# Altium PCB PCB1.PcbDoc
Units mil, origin at the board's own origin, x right, y up, seen from the top; angles counter-clockwise.
Board outline 3880 x 4010 mil, 2 copper layers (Top Layer, Bottom Layer); 84 components, 75 nets, 261 pads, 44 vias.
Unrouted connection lines stored in the file: 6.
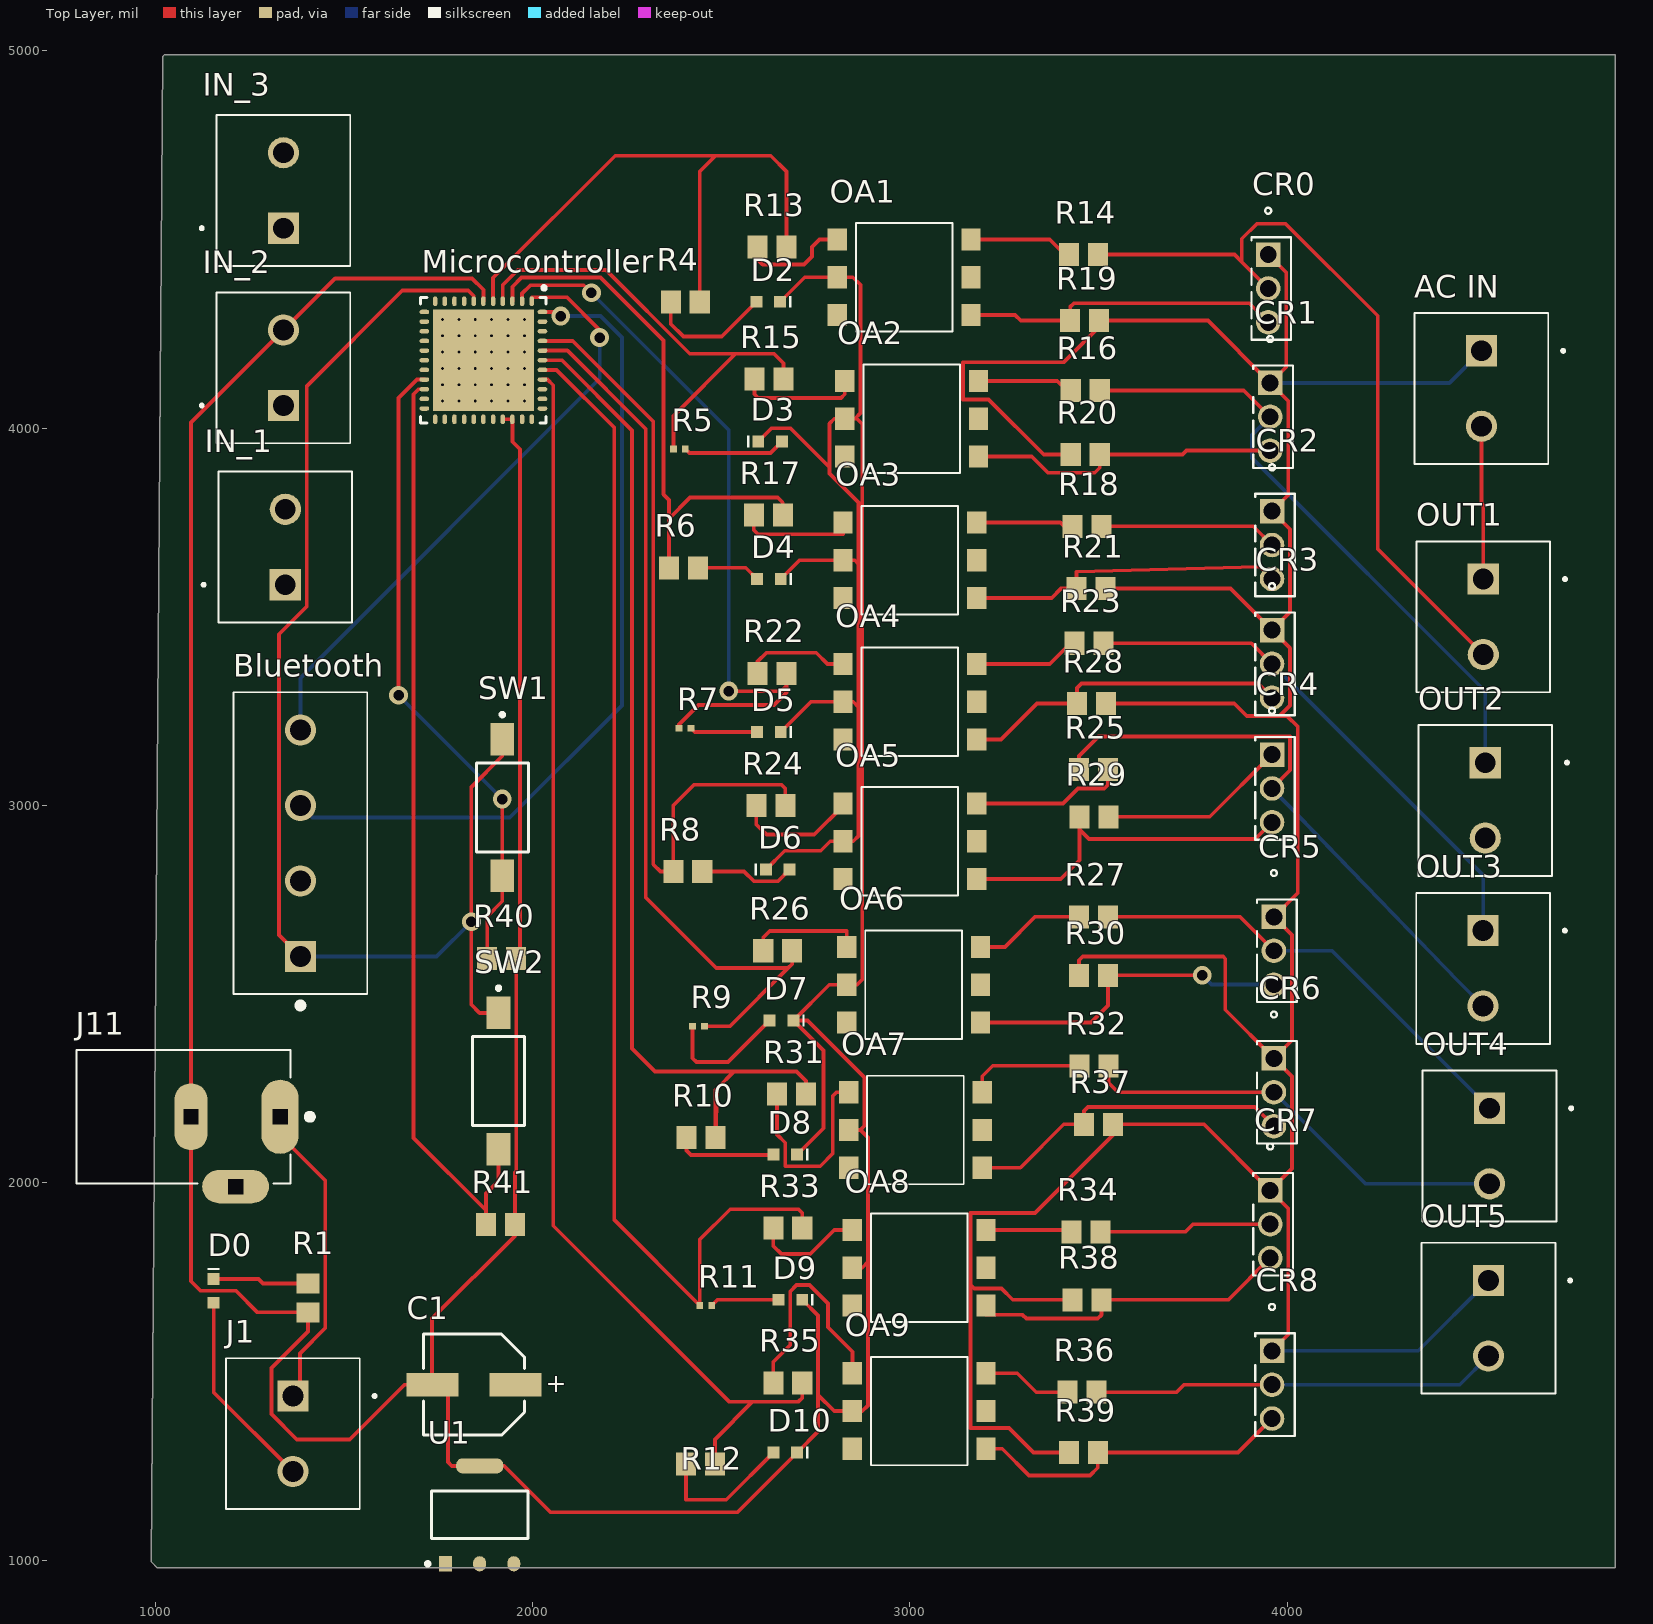
[diagram p0: Top Layer view]
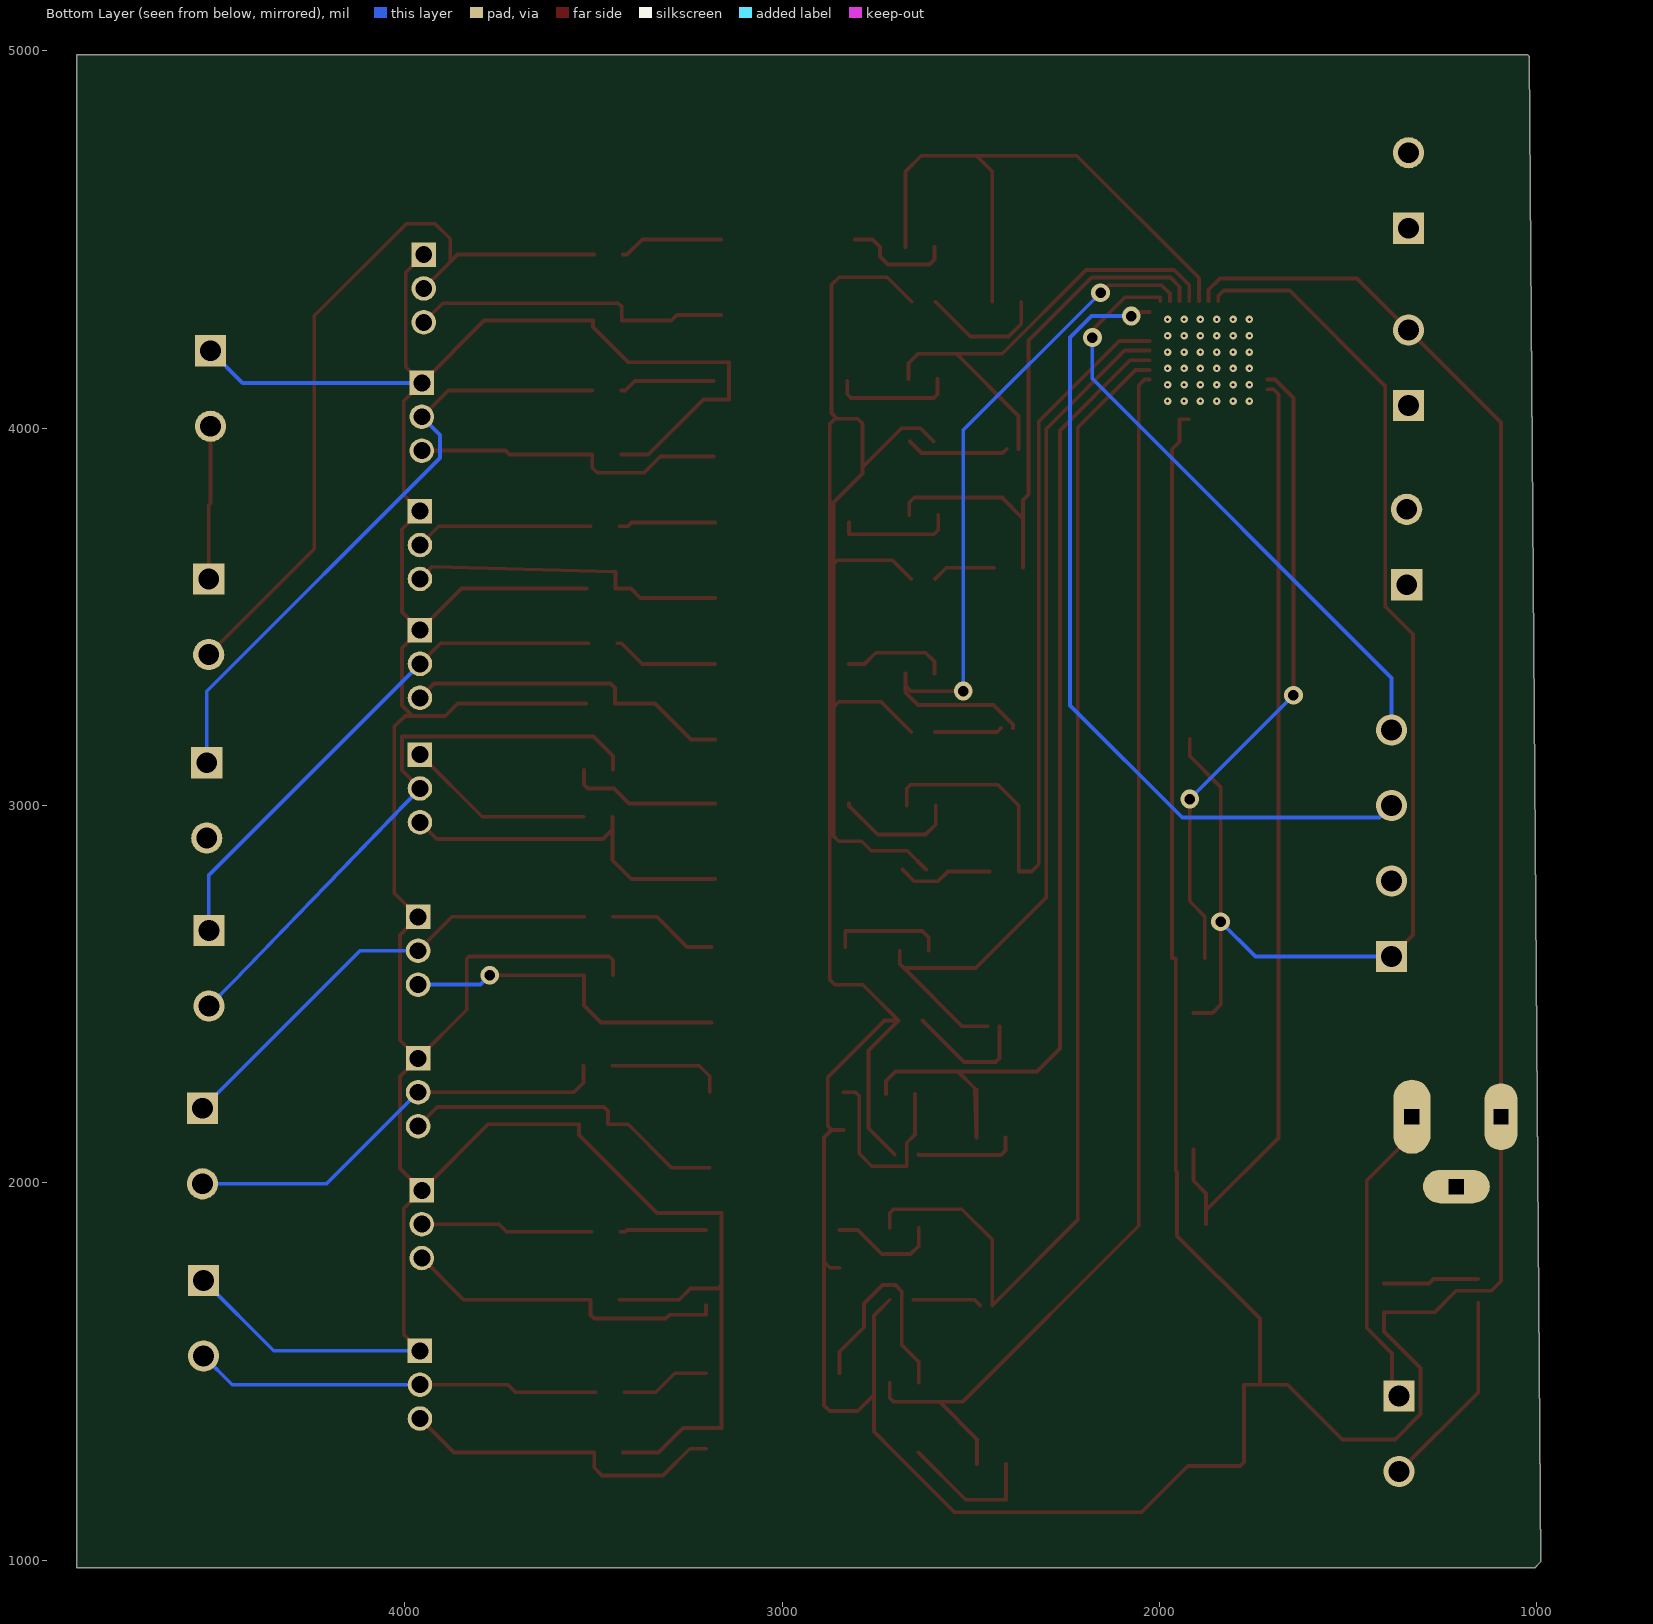
[diagram p1: Bottom Layer view, seen from below]

## Layer stack, top to bottom
Top Solder: solder mask 0.4, Solder Resist, Dk 3.5
Top Layer: signal copper 1.4
Dielectric 1: dielectric 12.6, FR-4, Dk 4.8
Bottom Layer: signal copper 1.4
Bottom Solder: solder mask 0.4, Solder Resist, Dk 3.5

## Board outline
1020,4985 1025,4990 4870,4990 4870,980 1005,980 990,995

## Design rules (kind name [scope] priority, off if disabled: settings)
Clearance [All] p1: gap=10 ignorepadtopadclearanceinfootprint=FALSE
PolygonConnect [All] p1: connectstyle=Relief reliefconductorwidth=10 reliefentries=4 polygonreliefangle="90 Angle" airgapwidth=10
RoutingVias [All] p1: holewidth=28 width=50 viastyle="Through Hole" minholewidth=28 minwidth=50 maxholewidth=28 maxwidth=50
SolderMaskExpansion [All] p1: expansion=4 istentingtop=FALSE
SupplyNets "Schematic Supply Nets" [InNet('GND')] p1: voltage=0.000
Width [All] p1: maxlimit=10 minlimit=10 preferedwidth=10
30 further rules are at their usual default settings.

## Classes and differential pairs
component class U_Microcontroller: Microcontroller
component class U_OutputSockets: OUT1 OUT2 OUT3 OUT4 OUT5
component class U_InputSockets: IN_1 IN_2 IN_3
component class U_Source_and_regulation: C1 D0 J1 J11 Q1 R1 U1
component class U_Probe_Switches: R40 R41 SP1 SP2 SW1 SW2
component class U_LEDS: D2 D3 D4 D5 D6 D7 D8 D9 D10 R4 R5 R6 R7 R8 R9 R10 R11 R12
component class U_Communication: Ble Bluetooth
component class U_AC_input: "AC IN" AC_in

## Components (designator, comment, footprint, x,y, rotation, side; value= is the part's Value field where it differs from the comment)
"AC IN" "796949-2" TE_796949-2 4515,4105 r270 top
Bluetooth "796949-4" TE_796949-4 1385,2600 r90 top
C1 "865060245006" WCAP-ASLL_D6.3H7.7 1844.76,1465 r0 top
CR0 "T405-600H" IPAK_STM 3950,4460 r270 top
CR1 "T405-600H" IPAK_STM 3955,4120 r270 top
CR2 "T405-600H" IPAK_STM 3960,3780 r270 top
CR3 "T405-600H" IPAK_STM 3960,3465 r270 top
CR4 "T405-600H" IPAK_STM 3960,3135 r270 top
CR5 "T405-600H" IPAK_STM 3965,2704.76 r270 top
CR6 "T405-600H" IPAK_STM 3965,2329.76 r270 top
CR7 "T405-600H" IPAK_STM 3955,1980 r270 top
CR8 "T405-600H" IPAK_STM 3960,1554.76 r270 top
D0 "Amber, 2V, 140°" WL-SMCW_0603_150060xx75000 1155,1713.5 r270 top
D2 "Amber, 2V, 140°" WL-SMCW_0603_150060xx75000 2625,4335 r180 top
D3 "Amber, 2V, 140°" WL-SMCW_0603_150060xx75000 2630,3965 r0 top
D4 "Amber, 2V, 140°" WL-SMCW_0603_150060xx75000 2626.5,3600 r180 top
D5 "Amber, 2V, 140°" WL-SMCW_0603_150060xx75000 2626.5,3195 r180 top
D6 "Amber, 2V, 140°" WL-SMCW_0603_150060xx75000 2650,2830 r0 top
D7 "Amber, 2V, 140°" WL-SMCW_0603_150060xx75000 2660,2430 r180 top
D8 "Amber, 2V, 140°" WL-SMCW_0603_150060xx75000 2670,2075 r180 top
D9 "Amber, 2V, 140°" WL-SMCW_0603_150060xx75000 2683.5,1690 r180 top
D10 "Amber, 2V, 140°" WL-SMCW_0603_150060xx75000 2670,1285 r180 top
IN_1 "Switch-IN" TE_796949-2 1345,3685 r90 top
IN_2 "Switch-IN" TE_796949-2 1340,4160 r90 top
IN_3 "Switch-IN" TE_796949-2 1340,4630 r90 top
J1 "Switch-IN" TE_796949-2 1365,1335 r270 top
J11 "PJ-002A" CUI_PJ-002A 1331.22,2175 r180 top
Microcontroller "PIC18F4520-I/ML" QFN-ML44_L 1870,4180 r270 top
OA1 "MOC3020S" MOC3020S 2985,4400 r270 top
OA2 "MOC3020S" MOC3020S 3005,4025 r270 top
OA3 "MOC3020S" MOC3020S 3000,3650 r270 top
OA4 "MOC3020S" MOC3020S 3000,3275 r270 top
OA5 "MOC3020S" MOC3020S 3000,2905 r270 top
OA6 "MOC3020S" MOC3020S 3010,2525 r270 top
OA7 "MOC3020S" MOC3020S 3015,2140 r270 top
OA8 "MOC3020S" MOC3020S 3025,1775 r270 top
OA9 "MOC3020S" MOC3020S 3025,1395 r270 top
OUT1 "Switch-IN" TE_796949-2 4520,3500 r270 top
OUT2 "Switch-IN" TE_796949-2 4525.17,3013.49 r270 top
OUT3 "Switch-IN" TE_796949-2 4519.55,2568.29 r270 top
OUT4 "Switch-IN" TE_796949-2 4536.41,2097.33 r270 top
OUT5 "Switch-IN" TE_796949-2 4533.7,1641.12 r270 top
R1 "ERJ6ENF2402V" RESC2013X70X40ML20T20 1405,1695 r90 top
R4 "ERJ6ENF2402V" RESC2013X70X40ML20T20 2405,4335 r0 top
R5 "ERJ2RKF1002X" RESC1005X40X25LL05T05 2389.25,3945 r0 top
R6 "ERJ6ENF2402V" RESC2013X70X40ML20T20 2400,3630 r180 top
R7 "ERJ2RKF1002X" RESC1005X40X25LL05T05 2404.25,3205 r0 top
R8 "ERJ6ENF2402V" RESC2013X70X40ML20T20 2411.61,2825 r180 top
R9 "ERJ2RKF1002X" RESC1005X40X25LL05T05 2440,2415 r180 top
R10 "ERJ6ENF2402V" RESC2013X70X40ML20T20 2446.61,2120 r0 top
R11 "ERJ2RKF1002X" RESC1005X40X25LL05T05 2459.25,1675 r0 top
R12 "ERJ6ENF2402V" RESC2013X70X40ML20T20 2445,1255 r0 top
R13 "ERJ6ENF2402V" RESC2013X70X40ML20T20 2635,4480 r180 top
R14 "ERJ6ENF2402V" RESC2013X70X40ML20T20 3460,4460 r180 top
R15 "ERJ6ENF2402V" RESC2013X70X40ML20T20 2626.61,4130 r180 top
R16 "ERJ6ENF2402V" RESC2013X70X40ML20T20 3465,4100 r180 top
R17 "ERJ6ENF2402V" RESC2013X70X40ML20T20 2625,3770 r180 top
R18 "ERJ6ENF2402V" RESC2013X70X40ML20T20 3470,3740 r180 top
R19 "ERJ6ENF2402V" RESC2013X70X40ML20T20 3463.39,4285 r180 top
R20 "ERJ6ENF2402V" RESC2013X70X40ML20T20 3465,3930 r0 top
R21 "ERJ6ENF2402V" RESC2013X70X40ML20T20 3480,3575 r180 top
R22 "ERJ6ENF2402V" RESC2013X70X40ML20T20 2635,3350 r180 top
R23 "ERJ6ENF2402V" RESC2013X70X40ML20T20 3475,3430 r180 top
R24 "ERJ6ENF2402V" RESC2013X70X40ML20T20 2631.61,3000 r180 top
R25 "ERJ6ENF2402V" RESC2013X70X40ML20T20 3486.61,3095 r0 top
R26 "ERJ6ENF2402V" RESC2013X70X40ML20T20 2650,2615 r180 top
R27 "ERJ6ENF2402V" RESC2013X70X40ML20T20 3486.61,2705 r180 top
R28 "ERJ6ENF2402V" RESC2013X70X40ML20T20 3481.61,3270 r180 top
R29 "ERJ6ENF2402V" RESC2013X70X40ML20T20 3488.39,2970 r180 top
R30 "ERJ6ENF2402V" RESC2013X70X40ML20T20 3486.61,2550 r0 top
R31 "ERJ6ENF2402V" RESC2013X70X40ML20T20 2686.61,2235 r180 top
R32 "ERJ6ENF2402V" RESC2013X70X40ML20T20 3488.39,2310 r180 top
R33 "ERJ6ENF2402V" RESC2013X70X40ML20T20 2676.61,1880 r180 top
R34 "ERJ6ENF2402V" RESC2013X70X40ML20T20 3466.61,1870 r180 top
R35 "ERJ6ENF2402V" RESC2013X70X40ML20T20 2676.61,1470 r180 top
R36 "ERJ6ENF2402V" RESC2013X70X40ML20T20 3456.61,1445 r180 top
R37 "ERJ6ENF2402V" RESC2013X70X40ML20T20 3500,2155 r180 top
R38 "ERJ6ENF2402V" RESC2013X70X40ML20T20 3470,1690 r0 top
R39 "ERJ6ENF2402V" RESC2013X70X40ML20T20 3460,1285 r0 top
R40 "ERJ6ENF2402V" RESC2013X70X40ML20T20 1918.39,2595 r180 top
R41 "ERJ6ENF2402V" RESC2013X70X40ML20T20 1915,1890 r180 top
SW1 "FSMSMTR" TECO-FSMSMTR_V 1920,2995 r270 top
SW2 "FSMSMTR" TECO-FSMSMTR_V 1910,2270 r270 top
U1 "LT1963EST-1.5#PBF" FP-ST-3-05-08-1630-IPC_C 1860,1120 r90 top

## Footprints (in the part's own frame and the unit in brackets; to place one, negate y for a bottom-side part, rotate by r counter-clockwise, add the part's x,y. Pads: shape width x height; smd on the part's side, far side on the other; paste and mask are expansions set on the pad)
CUI_PJ-002A [mm]
  oval 2.5x5 hole 1 square: 1(0,0)
  oval 2.25x4.5 hole 1 square: 2(6,0)
  oval 4.5x2.25 hole 1 square: 3(3,4.7)
  silkscreen extent -2.2,-4.5 13.7,4.5, body extent -0.7,-4.5 13.7,4.9, height 11
FP-ST-3-05-08-1630-IPC_C [mm]
  rect 1.014x0.87 smd paste+0 mask+0: 1(-3.295,2.3)
  rrect100% 1.014x0.87 smd paste+0 mask+0: 2(-3.295,0) 3(-3.295,-2.3)
  rrect86% 1.014x3.18 smd paste+0 mask+0: 4(3.295,0)
  silkscreen extent -3.42,-3.25 1.6,3.62, body extent -3.9,-3.35 3.9,3.35, height 0.25
IPAK_STM [mil]
  rect 65x65 / inner round 60 / far side rect 65x65 hole 45 unplated paste-99999 mask-32.5: 1(0,0)
  round 65 / inner round 60 / far side round 65 hole 45 unplated paste-99999 mask-32.5: 2(89.76,0) 3(179.53,0)
  silkscreen extent -124,-45 226,61, body extent -41,-39 221,56, height 284
MOC3020S [mm]
  rect 1.5x1.3 smd: P1(-2.54,-4.5) P2(0,-4.5) P3(2.54,-4.5) P4(2.54,4.5) P5(0,4.5) P6(-2.54,4.5)
  silkscreen extent -3.65,-3.25 3.65,3.25, body extent -4.26,-4.58 4.26,4.58, height 1.89
QFN-ML44_L [mm] "QFN, 44-Leads, Body 8x8mm, Pitch 0.65mm, Thermal Pad 6.8x6.8mm, IPC High Density"
  oval 0.65x0.3 smd: 1(-3.975,3.25) 2(-3.975,2.6) 3(-3.975,1.95) 4(-3.975,1.3) 5(-3.975,0.65) 6(-3.975,0) 7(-3.975,-0.65) 8(-3.975,-1.3) 9(-3.975,-1.95) 10(-3.975,-2.6) 11(-3.975,-3.25) 23(3.975,-3.25) 24(3.975,-2.6) 25(3.975,-1.95) 26(3.975,-1.3) 27(3.975,-0.65) 28(3.975,0) 29(3.975,0.65) 30(3.975,1.3) 31(3.975,1.95) 32(3.975,2.6) 33(3.975,3.25)
  oval 0.3x0.65 smd: 12(-3.25,-3.975) 13(-2.6,-3.975) 14(-1.95,-3.975) 15(-1.3,-3.975) 16(-0.65,-3.975) 17(0,-3.975) 18(0.65,-3.975) 19(1.3,-3.975) 20(1.95,-3.975) 21(2.6,-3.975) 22(3.25,-3.975) 34(3.25,3.975) 35(2.6,3.975) 36(1.95,3.975) 37(1.3,3.975) 38(0.65,3.975) 39(0,3.975) 40(-0.65,3.975) 41(-1.3,3.975) 42(-1.95,3.975) 43(-2.6,3.975) 44(-3.25,3.975)
  rect 6.8x6.8 smd: 45(0,0)
  silkscreen extent -5,-4.22 4.22,4.22, body extent -4.07,-4.07 4.08,4.08, height 1
RESC1005X40X25LL05T05 [mm] "Chip Resistor, 2-Leads, Body 1.05x0.55mm, IPC High Density"
  rect 0.45x0.45 smd: 1(-0.4,0) 2(0.4,0)
  body extent -0.53,-0.28 0.53,0.28, height 0.4
RESC2013X70X40ML20T20 [mm] "Chip Resistor, 2-Leads, Body 2.00x1.25mm, IPC Low Density"
  rect 1.35x1.55 smd: 1(-0.975,0) 2(0.975,0)
  body extent -1.1,-0.72 1.1,0.72, height 0.7
TE_796949-2 [mm]
  rect 2.1x2.1 hole 1.4: 1(-2.54,0)
  round 2.1 hole 1.4: 2(2.54,0)
  silkscreen extent -5.08,-4.5 5.08,5.6
TE_796949-4 [mm]
  rect 2.1x2.1 hole 1.4: 1(0,0)
  round 2.1 hole 1.4: 2(5.08,0) 3(10.16,0) 4(15.24,0)
  silkscreen extent -3.5,-4.5 17.78,4.5
TECO-FSMSMTR_V [mm] "SMD, 2-Leads, Body 6x3.5mm, Pitch 9.19mm"
  rect 2.2x1.6 smd: 1(-4.595,0)
  rect 2.18x1.6 smd: 2(4.595,0)
  silkscreen extent -6.37,-1.75 3,1.75, body extent -4.98,-1.75 4.98,1.75, height 4.4
WCAP-ASLL_D6.3H7.7 [mm] "Aluminium Electrolytic V-Chip SMT Capacitors, 6.3x7.7mm"
  rect 3.5x1.6 smd: 1(2.8,0) 2(-2.8,0)
  silkscreen extent -3.4,-3.4 3.4,3.4, body extent -3.65,-3.3 3.65,3.3, height 7.7
WL-SMCW_0603_150060xx75000 [mm] "SMD Mono-color Chip LED, body 1.60 x 0.80 mm"
  rect 0.8x0.8 smd: 1(-0.8,0) 2(0.8,0)
  silkscreen extent -1.55,-0.4 -1.4,0.4, body extent -0.8,-0.4 0.8,0.4, height 0.7

## Part data
"AC IN": "Connector Terminal Blocks 2 Position 5.08mm Solder Straight Thru-Hole 17.5A/Contact", Package=None, Availability=Unavailable, EU_RoHS_Compliance="Compliant with Exemptions", MF="TE Connectivity", MP=796949-2, Price=None, SnapEDA_Link=https://www.snapeda.com/parts/796949-2/TE%20Connectivity%20AMP%20Connectors/view-part/492230/?ref=snap, TE_purchase_URL=https://www.te.com/usa-en/product-796949-2.html?te_bu=Cor&te_type=disp&te_campaign=seda_glo_cor-seda-global-disp-prtnr-fy19-seda-model-bom-cta_sma-317_1&elqCampaignId=32493
Bluetooth: "4 Position Wire to Board Terminal Block Horizontal with Board 0.200 _5.08mm_ Through Hole", Package=None, Availability=Unavailable, EU_RoHS_Compliance="Compliant with Exemptions", MF="TE Connectivity", MP=796949-4, Price=None, SnapEDA_Link=https://www.snapeda.com/parts/796949-4/TE%20Connectivity%20AMP%20Connectors/view-part/492887/?ref=snap, TE_purchase_URL=https://www.te.com/usa-en/product-796949-4.html?te_bu=Cor&te_type=disp&te_campaign=seda_glo_cor-seda-global-disp-prtnr-fy19-seda-model-bom-cta_sma-317_1&elqCampaignId=32493
C1: library part CMP-03913-53914506-2, "865060245006 Aluminum Electrolytic Capacitor, Polarized, Aluminum (wet), 10V, 20% +Tol, 20% -Tol, 220uF, Surface Mount, 2626", Capacitance=220µF, Case/Package=Radial, Insulation Resistance=454.545kΩ, Leakage Current=22µA, Max Operating Temperature=105°C, Min Operating Temperature=-55°C, Ripple Current=300mA, Ripple Current (AC)=280mA, Tolerance=20%, Voltage Rating=10V, Diameter=6.3mm, Height=7.7mm, Height - Seated (Max)=7.6962mm, Impedance=360mΩ, Length=7.7mm, Life (Hours)=2000hours, Mount="Surface Mount", NexarPartId=53914506, Polarity=Polar, REACH SVHC=Unknown, RoHS=Compliant, Voltage Rating (DC)=10V
CR0 CR1 CR2 CR3 CR4 CR5 CR6 CR7 CR8: "No Description Available", Mfr_Name=STMicroelectronics
D0 D2 D3 D4 D5 D6 D7 D8 D9 D10: library part 150060AS75000, "WL-SMCW Mono-color Chip LED Waterclear, SMT, size 0603, Amber, 2V, 140°", Case/Size Code=0603, Emitting Color=Amber, Forward Voltage=2V, Manufacturer="Wurth Elektronik", Operating Temperature Max=85°C, Operating Temperature Min=-40°C, Category="Signal LEDs", Chip Technology=AlInGaP, ComponentLink1Description="Website Link", ComponentLink1URL=https://www.we-online.com/redexpert/article/150060AS75000?ad, ComponentLink2Description="Datasheet Link", ComponentLink2URL=https://www.we-online.com/redexpert/spec/150060AS75000?ad, Dominant Wavelength=605nm, Height=0.7mm, Length=1.6mm, Luminous Intensity=130mcd, Manufacturer Part Number=150060AS75000, Match Code=WL-SMCW, Mount="Surface Mount", Packaging="Tape and Reel", Peak Wavelength=610nm, Viewing Angle=140°, Width=0.8mm
IN_1 IN_2 IN_3 J1 OUT1 OUT2 OUT3 OUT4 OUT5: library part 796949-2, "Connector Terminal Blocks 2 Position 5.08mm Solder Straight Thru-Hole 17.5A/Contact", Package=None, Availability=Unavailable, EU_RoHS_Compliance="Compliant with Exemptions", MF="TE Connectivity", MP=796949-2, Price=None, SnapEDA_Link=https://www.snapeda.com/parts/796949-2/TE%20Connectivity%20AMP%20Connectors/view-part/492230/?ref=snap, TE_purchase_URL=https://www.te.com/usa-en/product-796949-2.html?te_bu=Cor&te_type=disp&te_campaign=seda_glo_cor-seda-global-disp-prtnr-fy19-seda-model-bom-cta_sma-317_1&elqCampaignId=32493
J11: "2.0 x 6.5 mm, 2.5 A, Horizontal, Through Hole, Dc Power Jack Connector", Package=None, Availability="In Stock", Check_prices=https://www.snapeda.com/parts/PJ-002A/CUI+Devices/view-part/?ref=eda, CUI_purchase_URL=https://www.cuidevices.com/product/interconnect/connectors/dc-power-connectors/jacks/pj-002a?utm_source=snapeda.com&utm_medium=referral&utm_campaign=snapedaBOM, MF="CUI Devices", MP=PJ-002A, Price=None, Purchase-URL=https://pricing.snapeda.com/search/part/PJ-002A/?ref=eda, SnapEDA_Link=https://www.snapeda.com/parts/PJ-002A/CUI+Devices/view-part/?ref=snap
Microcontroller: library part CMP-0116-00437-1, "Enhanced Flash Microcontroller with 10-Bit A/D and nanoWatt Technology, 32K Flash, 44-Pin QFN, Industrial Temperature Range", Code_IPC=QFN65P800X800-44V2, Code_JEDEC=MO-220, DatasheetVersion="revE, Oct-2008", PackageDescription="44-Lead Plastic Quad Flat, No Lead Package (ML) - 8x8 mm Body [QFN]", PackageReference=QFN-ML44, PackageVersion="revBB, Aug-2009"
OA1 OA2 OA3 OA4 OA5 OA6 OA7 OA8 OA9: "Optoisolator Triac Output 5000Vrms 1 Channel 6-SMD", Package="SMD-6 ON Semiconductor", Check_prices=https://www.snapeda.com/parts/MOC3020S/Lite-On+Inc./view-part/?ref=eda, MF="Lite-On Inc.", MP=MOC3020S, SnapEDA_Link=https://www.snapeda.com/parts/MOC3020S/Lite-On+Inc./view-part/?ref=snap
R1 R4 R6 R8 R10 R12 R13 R14 R15 R16 R17 R18 R19 R20 R21 R22 R23 R24 R25 R26 R27 R28 R29 R30 R31 R32 R33 R34 R35 R36 R37 R38 R39 R40 R41: library part CMP-2001-00525-1, Manufacturer=Panasonic, Part Number=ERJ6ENF2402V
R5 R7 R9 R11: library part CMP-2000-07588-1, "Chip Resistor, 10 KOhm, +/- 1%, 0.1 W, -55 to 155 degC, 0402 (1005 Metric), RoHS, Tape and Reel", Case Code (Imperial)=0402, Case Code (Metric)=1005, Manufacturer=Panasonic, Max Operating Temperature=155degC, Max Power Dissipation=100mW, Min Operating Temperature=-55degC, Package Description="2-Pin Surface Mount Device, Body 1 x 0.5 mm", Package Quantity=1, Package Reference=402, Resistance=10KOhm, Temperature Coefficient=100ppm\/degreesC, Tolerance=1%, Voltage Rating=50V, Case\/Package=0402, Composition=ThickFilm, Contact Plating=Tin, Datasheet URL=https://industrial.panasonic.com/cdbs/www-data/pdf/RDA0000/AOA0000C304.pdf, Datasheet Version=02/2017, Depth=0.5mm, Height=0.35mm, Lead Free=LeadFree, Length=1mm, Manufacturer URL=http://www.panasonic.com/, Military Standard=Not, Mount=SurfaceMount, Mounting Technology=SurfaceMount, Number of Pins=2, Number of Terminations=2, Packaging=TapeandReel, Power Rating=100mW, Radiation Hardening=No, REACH SVHC=NoSVHC, RoHSCompliant=True, Termination=SMD/SMT, Voltage Rating (DC)=50V, Width=0.02inch
SW1 SW2: library part CMP-2000-07501-1, "FSMSM Push Button Switch, 50 mA, -35 to 85 degC, 2-Pin SMD, RoHS, Tape and Reel", Case\/Package=SMD/SMT, Contact Current Rating=50mA, Contact Resistance=100mOhm, Manufacturer="TE Connectivity", Max Operating Temperature=85degC, Max Voltage Rating (DC)=12V, Min Operating Temperature=-35degC, Operating Force=180gf, Package Description="2-Pin Surface Mount Device, Body 6 x 3.5 mm, Pitch 9.19 mm", Package Quantity=1800, Voltage Rating (DC)=24V, Actuator Length=1.07mm, Actuator Material=Polyamide, Contact Material=Brass, Contact Plating=Silver, Current Rating=50mA, Datasheet URL=http://www.te.com/commerce/DocumentDelivery/DDEController?Action=showdoc&DocId=Customer+Drawing%7F1437566-3%7FC2%7Fpdf%7FEnglish%7FENG_CD_1437566-3_C2_1437566_3_1_c.dwg.pdf%7F1437566-4, Datasheet Version="Rev. C2, 08/2014", Electrical Life=20000Cycles, ELV=Compliant, Illumination Type=Illuminated, Lead Free=LeadFree, Manufacturer URL=http://www.te.com/, Mechanical Life=20000Cycles, Mount=SurfaceMount, Mounting Technology=SurfaceMount, Orientation=Straight, Package Reference=FSMSMTR, Packaging=TapeandReel, REACH SVHC=Unknown, RoHSCompliant=true, Switch Travel=0.25mm, Termination=GullWing, Throw Configuration=SPST
U1: library part CMP-09138-000163-1, "IC REG LINEAR 1.5V 1.5A SOT223-3", Case/Package=SOT-223, Dropout Voltage=340mV, Max Input Voltage=20V, Max Operating Temperature=125°C, Max Output Current=1.5A, Min Current Limit=1.6A, Min Input Voltage=1.9V, Min Operating Temperature=-40°C, Nominal Output Voltage=1.5V, Package Quantity=78, Quiescent Current=1mA, Height=1.7mm, Lead Free="Lead Free", Length=6.71mm, Mount="Surface Mount", Number of Outputs=1, Number of Pins=3, Number of Regulators=1, Output Current=1.5A, Output Type=Fixed, Output Voltage=1.5V, Packaging=Rail/Tube, Polarity=Positive, REACH SVHC="No SVHC", RoHS Compliant=Yes, Series=-, Width=3.71mm

## Via types
v1: diameter 19.68, hole 7.87, Top Layer to Bottom Layer, 36 vias
v2: diameter 50, hole 28, Top Layer to Bottom Layer, 8 vias

## Nets (pads, with @x,y where several pads share a name; then routed paths per layer and width w, separated by ;. In a path a pad name is that pad's centre, name@x,y a point inside that pad or via, vN(x,y) a via of type N, cw(c..) or ccw(c..) an arc to the next point about the centre after c; other vN are vias at no path point)
AC+: "AC IN.2" OUT1.1 | length 407.1
  Top Layer w10: 4515,4005 4515,3802 4520,3797 OUT1.1
AC-: "AC IN.1" CR0.1 CR1.1 CR2.1 CR3.1 CR5.1 CR6.1 CR7.1 CR8.1 OUT5.1 R19.1 R20.1 R21.1 R28.1 R30.1 R37.1 R38.1 R39.1 | length 9698.3
  Top Layer w10: R39.1 3328,1285 3263,1350 3161,1350 3161,1730 ; R20.1 3355,3930 3209,4076 3141,4076 3141,4175 3409,4175 3501.77,4267.77 R19.1 3790,4285 CR1.1 ; R38.1 3273,1690 3243,1720 3171,1720 3161,1730 ; R30.1 3448.23,2590 3458.23,2600 3830,2600 3836,2594 3836,2458.76 CR6.1 ; R21.1 3850,3575 CR3.1 ; R28.1 3860,3270 3893,3237 3980,3237 ; CR0.1 3998,4412 3998,4163 CR1.1 ; CR8.1 4003,1597.76 4003,1932 CR7.1 ; 3161,1730 3161,1920 3332,1920 3538.39,2126.39 R37.1 3780,2155 CR7.1 ; CR7.1 4013,2038 4013,2281.76 CR6.1 ; CR1.1 4003,4072 4003,3823 CR2.1 4008,3732 4008,3513 CR3.1 ; CR3.1 4008,3417 4008,3265 3980,3237 ; CR6.1 4013,2377.76 4013,2656.76 CR5.1 4028,2767.76 4028,3209 4000,3237 3980,3237
  Bottom Layer w10: CR1.1 4430,4120 4515,4205 ; CR8.1 4347.35,1554.76 OUT5.1
DS1: Microcontroller.5 R4.2 R13.1 | length 1595.6
  Top Layer w10: Microcontroller.5 1895.59,4398.46 2219.13,4722 2485.39,4722 ; R4.2 2443.39,4680 2485.39,4722 ; R13.1 2673.39,4680 2631.39,4722 2485.39,4722
DS2: Microcontroller.4 R5.1 R15.1 | length 1267.4
  Top Layer w10: Microcontroller.4 1921.18,4379.18 1961,4419 2194.78,4419 2416.78,4197 2538,4197 ; R5.1 2373.5,4032.5 2538,4197 ; R15.1 2665,4172 2640,4197 2538,4197
DS3: Microcontroller.3 R6.2 R17.1 | length 1488.9
  Top Layer w10: Microcontroller.3 1946.77,4374.77 1971,4399 2180,4399 2347,4232 2347,3824.61 2361.61,3810 2361.61,3760 ; R6.2 2361.61,3760 ; R17.1 2663.39,3802.61 2650,3816 2417.61,3816 2361.61,3760
DS4: Microcontroller.2 R7.1 R22.1 | length 1967.4
  Top Layer w10: Microcontroller.2 1972.36,4357 1994.36,4379 2136,4379 v2(2156,4359) ; R7.1 2388.5,3214.5 2440,3266 2640,3266 2673.39,3299.39 2673.39,3316.39 ; v2(2520,3303) 2660,3303 2673.39,3316.39 ; R22.1 2673.39,3316.39
  Bottom Layer w10: v2(2156,4359) 2520,3995 v2(2520,3303)
DS5: Microcontroller.41 R8.2 R24.1 | length 2160.6
  Top Layer w10: Microcontroller.41 2106.82,4231.18 2320.04,4017.96 2320.04,2843.96 2339,2825 R8.2 2373.23,3000 2428.23,3055 2660,3055 2670,3045 R24.1
DS6: Microcontroller.40 R9.1 R26.1 | length 2392.3
  Top Layer w10: Microcontroller.40 2092.41,4205.59 2300.04,3997.96 2300.04,2755.96 2487,2569 2677.39,2569 ; R9.1 2523.39,2415 2677.39,2569 ; R26.1 2688.39,2580 2677.39,2569
DS7: Microcontroller.39 R10.2 R31.1 | length 2810
  Top Layer w10: Microcontroller.39 2078,4180 2264,3994 2264,2356 2325,2295 2534,2295 ; R31.1 2725,2270 2700,2295 2534,2295 ; 2489.5,2250.5 2534,2295 ; 2489.5,2250.5 2485,2246 R10.2 2489.5,2250.5
DS8: Microcontroller.38 R11.1 R33.1 | length 3197.4
  Top Layer w10: Microcontroller.38 2063.59,4154.41 2217,4001 2217,1901.5 R11.1 2443.5,1849.5 2524,1930 2705,1930 2715,1920 R33.1
DS9: Microcontroller.37 R12.2 R35.1 | length 3366.1
  Top Layer w10: Microcontroller.37 2040,4128.82 2055,4113.82 2055,1886 2521,1420 2583.39,1420 ; R12.2 2483.39,1320 2583.39,1420 ; R35.1 2715,1430 2705,1420 2583.39,1420
Echo-A: IN_1.2
Echo-B: IN_3.2
GND: C1.2 D2.1 D3.1 D4.1 D5.1 D6.1 D7.1 D8.1 D9.1 D10.1 IN_2.2 J11.2 Microcontroller.6 Microcontroller.30 Microcontroller.31 OA1.P2 OA2.P2 OA3.P2 OA4.P2 OA5.P2 OA6.P2 OA7.P2 OA8.P2 OA9.P2 R1.1 R40.1 R41.1 U1.2 U1.4 | length 15172.3
  Top Layer w10: Microcontroller.6 1870,4367 1840,4397 1477,4397 IN_2.2 1095,4015 J11.2 1095,1739 1120,1714 1214,1714 1271.39,1656.61 R1.1 1405,1606 1308,1509 1308,1387 1375,1320 1515.55,1320 1660.55,1465 C1.2@1734,1465 ; Microcontroller.30 Microcontroller.31 1946.77,3964.23 1967,3944 1967,2595 R40.1 1956.77,2030.39 1953.39,2027 R41.1 1953.39,1859.39 1734,1640 C1.2@1734,1465 ; D3.1 2633.5,4000 2683.5,4000 2787,3896.5 ; D6.1 2668.5,2880 2764,2880 2789,2905 OA5.P2 2850,2905 2864,2919 2864,3261 ; D2.1 2721.5,4400 OA1.P2 2849,4400 2869,4380 2869,4040 2854,4025 ; D5.1 2737.99,3275 OA4.P2 2850,3275 2864,3261 ; D4.1 2707.99,3650 OA3.P2 2854,3650 2864,3640 ; D8.1 2771,2144.5 2771,2350.5 D7.1 ; D9.1 2757,1648 2757,1438 ; OA7.P2 2869,2140 ; OA8.P2 2874,1775 2889,1790 ; C1.2@1734,1465 C1.2 1776,1465 1776,1260 1786.28,1249.72 U1.4 1925,1249.72 2047.72,1127 2543.5,1127 D10.1 2757,1340.5 2757,1438 ; D7.1 2729,2430 2879,2280 2879,2150 2869,2140 ; D7.1 2786.5,2525 OA6.P2 2860,2525 2874,2539 2874,4011 2860,4025 2854,4025 ; 2757,1438 2800,1395 OA9.P2 2874,1395 2889,1410 2889,1790 ; 2787,3896.5 2787,4012 2800,4025 OA2.P2 2854,4025 ; 2787,3896.5 2787,3880 2864,3803 2864,3640 ; 2864,3261 2864,3640 ; 2869,2140 2889,2120 2889,1790
NetBluetooth_2: Bluetooth.2
NetCR0_3: CR0.3 OA1.P4 R19.2 | length 855.1
  Top Layer w10: OA1.P4 3279,4300 3294,4285 R19.2 3425,4321 3435,4331 3899.47,4331 CR0.3
NetCR1_3: CR1.3 OA2.P4 R20.2 | length 835.4
  Top Layer w10: OA2.P4 3323,3925 3366,3882 3490.39,3882 3503.39,3895 R20.2 3723,3930 3733.47,3940.47 CR1.3
NetCR2_3: CR2.3 OA3.P4 R21.2 | length 851.5
  Top Layer w10: OA3.P4 3376,3550 3401,3575 R21.2 3441.61,3619.61 3927.47,3633 CR2.3
NetCR3_3: CR3.3 OA4.P4 R28.2 | length 883.8
  Top Layer w10: OA4.P4 3242,3175 3337,3270 R28.2 3443.23,3311.23 3455,3323 3922.47,3323 CR3.3
NetCR4_1: CR4.1 R29.1 | length 501.6
  Top Layer w10: R29.1 3795,2970 CR4.1
NetCR4_3: CR4.3 OA5.P4 R29.2 | length 947.3
  Top Layer w10: OA5.P4 3400,2805 3450,2855 3450,2936 ; R29.2 3450,2936 ; CR4.3 3915.53,2911 3475,2911 3450,2936
NetCR5_3: CR5.3 OA6.P4 R30.2 | length 886.7
  Top Layer w10: OA6.P4 3480,2425 3525,2470 R30.2 v2(3775,2550)
  Bottom Layer w10: v2(3775,2550) 3799.76,2525.24 CR5.3
NetCR6_3: CR6.3 OA7.P4 R37.2 | length 881.1
  Top Layer w10: OA7.P4 3293,2040 3408,2155 R37.2 3461.61,2190 3472.61,2201 3914.24,2201 CR6.3
NetCR7_2: CR7.2 R34.1 | length 458.4
  Top Layer w10: R34.1 3730,1870 3750.24,1890.24 CR7.2
NetCR7_3: CR7.3 OA8.P4 R38.2 | length 871.9
  Top Layer w10: OA8.P4 3202.17,1650 3299,1650 3309,1640 3498.39,1640 3508.39,1650 R38.2 3844.53,1690 CR7.3
NetCR8_3: CR8.3 OA9.P4 R39.2 | length 873.3
  Top Layer w10: OA9.P4 3245,1295 3316,1224 3477.39,1224 3498.39,1245 R39.2 3869.76,1285 CR8.3
NetD0_1: D0.1 R1.2 | length 254.8
  Top Layer w10: D0.1 1274,1745 1285.61,1733.39 R1.2
NetD0_2: D0.2 J1.2 U1.1 | length 534
  Top Layer w10: D0.2 1155,1445 J1.2
NetD2_2: D2.2 R4.1 | length 337.4
  Top Layer w10: R4.1 2366.61,4276.39 2400,4243 2501.5,4243 D2.2
NetD3_2: D3.2 R5.2 | length 273.9
  Top Layer w10: R5.2 2416,3934 2630.5,3934 D3.2
NetD4_2: D4.2 R6.1 | length 169
  Top Layer w10: R6.1 2565,3630 D4.2
NetD5_2: D5.2 R7.2 | length 179.1
  Top Layer w10: R7.2 2430,3195 D5.2
NetD6_2: D6.2 R8.1 | length 255.1
  Top Layer w10: R8.1 2561,2825 2587,2799 2650.5,2799 D6.2
NetD7_2: D7.2 R9.2 | length 338.8
  Top Layer w10: R9.2 2424.25,2330.25 2434.5,2320 2518.5,2320 D7.2
NetD8_2: D8.2 R10.1 | length 269.8
  Top Layer w10: R10.1 2408.23,2085.77 2420,2074 2637.5,2074 D8.2
NetD9_2: D9.2 R11.2 | length 183.2
  Top Layer w10: R11.2 2490,1690 D9.2
NetD10_2: D10.2 R12.1 | length 378.1
  Top Layer w10: R12.1 2406.61,1160.89 2407.5,1160 2513.5,1160 D10.2
NetJ1_1: J1.1 J11.1 | length 836.4
  Top Layer w10: J11.1 1331.22,2126 1451,2006.22 1451,1615 1384,1548 1384,1435 J1.1
NetMicrocontroller_19: Microcontroller.19 R40.2 SW1.2 | length 1704.2
  Top Layer w10: v2(1645,3292) 1645,4080 1693.82,4128.82 Microcontroller.19 ; R40.2 1880,2706 1920,2746 SW1.2 v2(1920,3017)
  Bottom Layer w10: v2(1645,3292) v2(1920,3017)
NetMicrocontroller_20: Microcontroller.20 R41.2 SW2.2 | length 2488.9
  Top Layer w10: Microcontroller.20 1698.23,4103.23 1685,4090 1685,2119 1876.61,1927.39 ; R41.2 1876.61,1927.39 ; SW2.2 1910,2005.39 1876.61,1972 1876.61,1927.39
NetMicrocontroller_21: Microcontroller.21
NetMicrocontroller_22: Microcontroller.22
NetMicrocontroller_23: Microcontroller.23
NetMicrocontroller_24: Microcontroller.24
NetOA1_P1: OA1.P1 R13.2 | length 291.4
  Top Layer w10: R13.2 2596.61,4447.39 2610,4434 2720,4434 2741,4455 2741,4480 2761,4500 OA1.P1
NetOA1_P6: OA1.P6 R14.2 | length 276
  Top Layer w10: OA1.P6 3371,4500 3411,4460 R14.2
NetOA2_P1: OA2.P1 R15.2 | length 322.9
  Top Layer w10: R15.2 2588.23,4090 2598.23,4080 2817.83,4080 2827.83,4090 OA2.P1
NetOA2_P6: OA2.P6 R16.2 | length 254.8
  Top Layer w10: OA2.P6 3391,4125 3416,4100 R16.2
NetOA3_P1: OA3.P1 R17.2 | length 311.8
  Top Layer w10: R17.2 2586.61,3730 2597.61,3719 2822.83,3719 OA3.P1
NetOA3_P6: OA3.P6 R18.2 | length 258.6
  Top Layer w10: OA3.P6 3399,3750 3409,3740 R18.2
NetOA4_P1: OA4.P1 R22.2 | length 279.9
  Top Layer w10: R22.2 2596.61,3381.61 2620,3405 2752,3405 2782,3375 OA4.P1
NetOA4_P6: OA4.P6 R23.2 | length 282.2
  Top Layer w10: OA4.P6 3371.01,3375 3426.01,3430 R23.2
NetOA5_P1: OA5.P1 R24.2 | length 328.5
  Top Layer w10: R24.2 2593.23,2949.77 2620,2923 2747,2923 2822.83,2998.83 OA5.P1
NetOA5_P6: OA5.P6 R25.2 | length 408.5
  Top Layer w10: OA5.P6 3406,3005 3446,3045 3515,3045 3525,3055 R25.2
NetOA6_P1: OA6.P1 R26.2 | length 305.3
  Top Layer w10: R26.2 2611.61,2650 2628.61,2667 2832.83,2667 OA6.P1
NetOA6_P6: OA6.P6 R27.2 | length 294.2
  Top Layer w10: OA6.P6 3252,2625 3332,2705 R27.2
NetOA7_P1: OA7.P1 R31.2 | length 538.4
  Top Layer w10: R31.2 2648.23,2127.77 2670,2106 2670,2044 2762.53,2044 2796,2077.47 2796,2230 2806,2240 OA7.P1
NetOA7_P6: OA7.P6 R32.2 | length 311.5
  Top Layer w10: OA7.P6 3192.17,2282.17 3220,2310 R32.2
NetOA8_P1: OA8.P1 R33.2 | length 292.4
  Top Layer w10: R33.2 2638.23,1832.77 2660,1811 2736,1811 2800,1875 OA8.P1
NetOA8_P6: OA8.P6 R34.2 | length 228.1
  Top Layer w10: OA8.P6 3412,1875 3417,1870 R34.2
NetOA9_P1: OA9.P1 R35.2 | length 599.7
  Top Layer w10: R35.2 2638.23,1525.23 2683,1570 2683,1712 2700,1729 2734,1729 2783,1680 2783,1617 2847.83,1552.17 OA9.P1
NetOA9_P6: OA9.P6 R36.2 | length 236.8
  Top Layer w10: OA9.P6 3285,1495 3335,1445 R36.2
OUT-1: CR0.2 OUT1.2 R14.1 | length 2042.2
  Top Layer w10: R14.1 3860.24,4460 3880,4440.24 ; CR0.2 3880,4440.24 ; OUT1.2 4240,3680 4240,4298 3996,4542 3920,4542 3880,4502 3880,4440.24
OUT-2: CR1.2 OUT2.1 R16.1 | length 1673.2
  Top Layer w10: R16.1 3885.24,4100 CR1.2
  Bottom Layer w10: CR1.2 3907,3982.24 3907,3921 4525.17,3302.83 OUT2.1
OUT-3: CR2.2 OUT2.2 R18.1 | length 472.2
  Top Layer w10: R18.1 3910.24,3740 CR2.2
OUT-4: CR3.2 OUT3.1 R23.1 | length 1408
  Top Layer w10: R23.1 3905.24,3430 CR3.2
  Bottom Layer w10: CR3.2 4519.55,2815.69 OUT3.1
OUT-5: CR4.2 OUT3.2 R25.1 | length 1579
  Top Layer w10: R25.1 3448.23,3131.46 3499.77,3183 4008,3183 4008,3093.24 CR4.2
  Bottom Layer w10: CR4.2 4455,2532.84 OUT3.2
OUT-6: CR5.2 OUT4.1 R27.1 | length 1221.7
  Top Layer w10: R27.1 3875,2705 CR5.2
  Bottom Layer w10: CR5.2 4118.75,2615 OUT4.1
OUT-7: CR6.2 OUT4.2 R32.1 | length 1165.5
  Top Layer w10: R32.1 3526.77,2265 3551.77,2240 CR6.2
  Bottom Layer w10: CR6.2 4207.67,1997.33 OUT4.2
OUT-9: CR8.2 OUT5.2 R36.1 | length 1078.5
  Top Layer w10: R36.1 3707,1445 3727,1465 CR8.2
  Bottom Layer w10: CR8.2 4457.59,1465 OUT5.2
RX: Bluetooth.4 Microcontroller.1 | length 1614.9
  Top Layer w10: Microcontroller.1 1997.95,4346.85 2091.15,4346.85 2178,4260 v2(2178,4240)
  Bottom Layer w10: Bluetooth.4 1385,3338 2178,4131 v2(2178,4240)
trig-A: IN_1.1
trig-B: IN_3.1
TX: Bluetooth.3 Microcontroller.44 | length 2201.9
  Top Layer w10: Microcontroller.44 2064,4307.95 v2(2074.95,4297)
  Bottom Layer w10: Bluetooth.3 1417,2968 1940,2968 2237,3265 2237,4240 2180,4297 v2(2074.95,4297)
VINA: Bluetooth.1 C1.1 IN_2.1 Microcontroller.7 SW1.1 SW2.1 U1.3 | length 3444.5
  Top Layer w10: Bluetooth.1 1328,2657 1328,3454 1402,3528 1402,4112 1655,4365 1830,4365 1844.41,4350.59 Microcontroller.7 ; SW2.1 1910,2450 1860,2450 1838,2472 v2(1838,2692) 1838,3049.23 1920,3131.23 SW1.1
  Bottom Layer w10: Bluetooth.1 1746,2600 v2(1838,2692)
pads on no net: J11.3 Microcontroller.8 Microcontroller.9 Microcontroller.10 Microcontroller.11 Microcontroller.12 Microcontroller.13 Microcontroller.14 Microcontroller.15 Microcontroller.16 Microcontroller.17 Microcontroller.18 Microcontroller.25 Microcontroller.26 Microcontroller.27 Microcontroller.28 Microcontroller.29 Microcontroller.32 Microcontroller.33 Microcontroller.34 Microcontroller.35 Microcontroller.36 Microcontroller.42 Microcontroller.43 Microcontroller.45 OA1.P3 OA1.P5 OA2.P3 OA2.P5 OA3.P3 OA3.P5 OA4.P3 OA4.P5 OA5.P3 OA5.P5 OA6.P3 OA6.P5 OA7.P3 OA7.P5 OA8.P3 OA8.P5 OA9.P3 OA9.P5
copper on no net:
  other v1: 1761.73,4071.73 1805.04,4071.73 1848.35,4071.73 1891.65,4071.73 1934.96,4071.73 1978.27,4071.73 1761.73,4115.04 1805.04,4115.04 1848.35,4115.04 1891.65,4115.04 1934.96,4115.04 1978.27,4115.04 1761.73,4158.35 1805.04,4158.35 1848.35,4158.35 1891.65,4158.35 1934.96,4158.35 1978.27,4158.35 1761.73,4201.65 1805.04,4201.65 1848.35,4201.65 1891.65,4201.65 1934.96,4201.65 1978.27,4201.65 1761.73,4244.96 1805.04,4244.96 1848.35,4244.96 1891.65,4244.96 1934.96,4244.96 1978.27,4244.96 1761.73,4288.27 1805.04,4288.27 1848.35,4288.27 1891.65,4288.27 1934.96,4288.27 1978.27,4288.27

## Text inside footprints (layer, text, board x,y; h text height)
C1: Top Overlay "+" at 2035.71,1445.32 h48